# EAGLE board small-fix-cards-panelized (EAGLE 9.6.2)
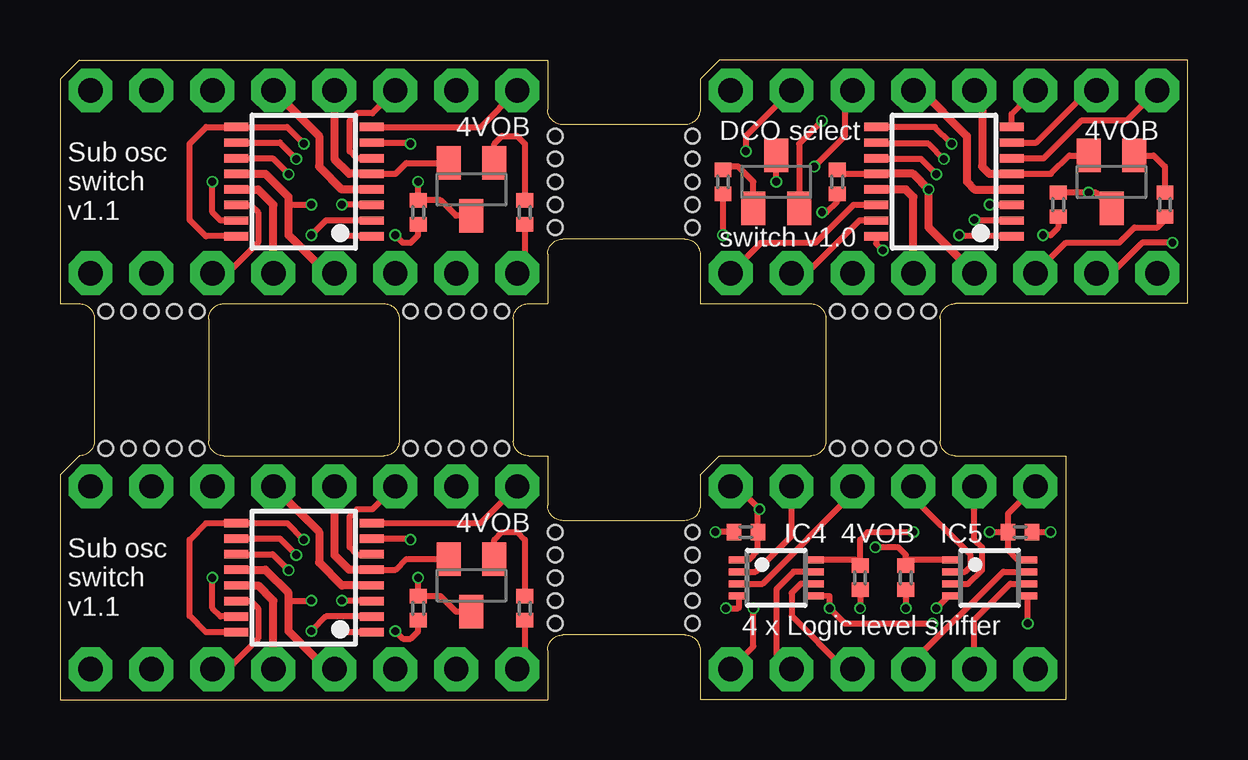
[diagram p0: board, top side]
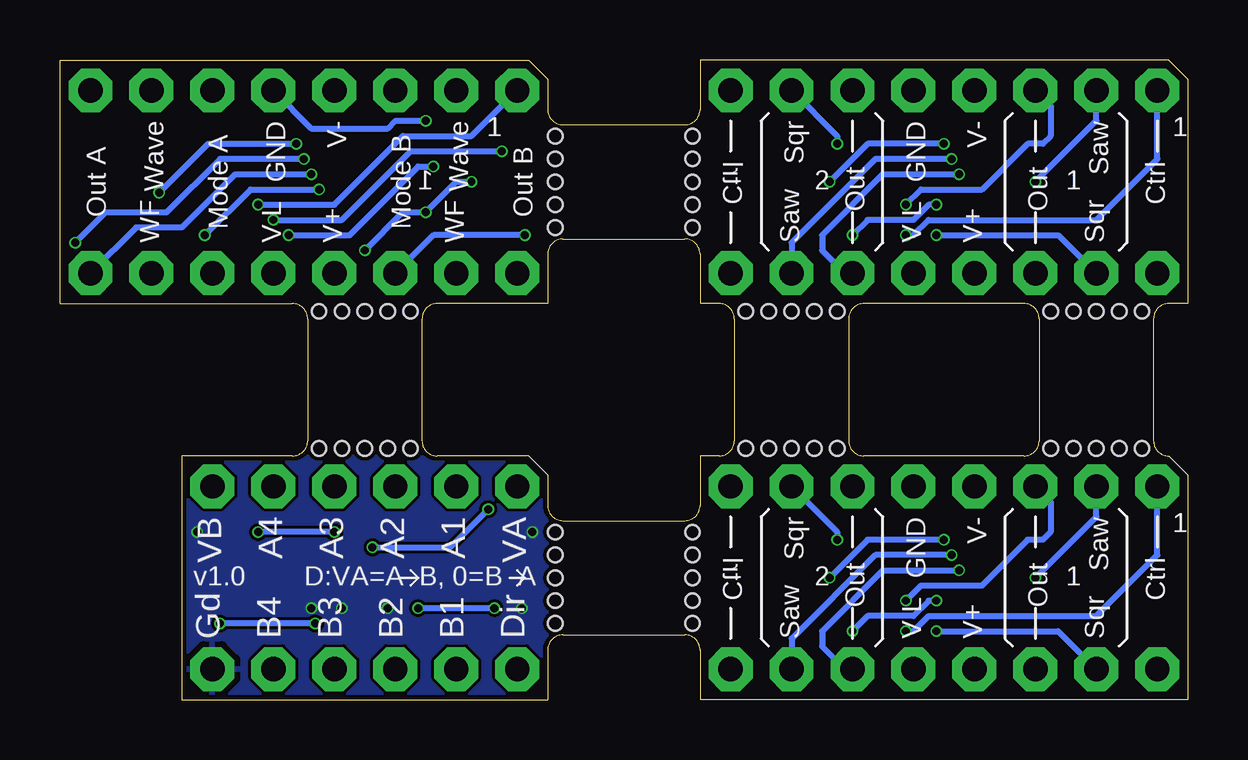
[diagram p1: board, bottom side, seen from below]

Size 46.99 x 26.67 mm. Coordinates in mm from the lower left corner, seen from the top.
Outline: 0,0 20.32,0 20.32,2.06 arc-90 20.95,2.7 26.04,2.7 arc-90 26.67,2.06 26.67,0 41.91,0 41.91,10.16 37.31,10.16 arc-90 36.67,10.79 36.67,15.88 arc-90 37.31,16.51 46.99,16.51 46.99,26.67 27.46,26.67 26.67,25.88 26.67,24.61 arc-90 26.04,23.97 20.95,23.97 arc-90 20.32,24.61 20.32,26.67 0.79,26.67 0,25.88 0,16.51 0.79,16.51 arc-90 1.43,15.88 1.43,10.79 arc-90 0.79,10.16 0,9.37 0,0
Outline: 6.83,10.16 arc-90 6.19,10.79 6.19,15.88 arc-90 6.83,16.51 13.49,16.51 arc-90 14.13,15.88 14.13,10.79 arc-90 13.49,10.16 6.83,10.16
Outline: 19.53,10.16 arc-90 18.89,10.79 18.89,15.88 arc-90 19.53,16.51 20.32,16.51 20.32,18.57 arc-90 20.95,19.21 26.04,19.21 arc-90 26.67,18.57 26.67,16.51 31.27,16.51 arc-90 31.91,15.88 31.91,10.79 arc-90 31.27,10.16 27.46,10.16 26.67,9.37 26.67,8.1 arc-90 26.04,7.46 20.95,7.46 arc-90 20.32,8.1 20.32,10.16 19.53,10.16
Copper layers (1*16): Top 0.035mm / dielectric 1.6mm / Bottom 0.035mm
Design rules "jlcpcb-2layers": minimum track width 5mil, minimum drill 0.3mm, track to track 5mil, track to pad 5mil, pad to pad 5mil, via to via 5mil, smd to smd 5mil, copper to edge 0.2mm, drill to drill 6mil, minimum pad ring 10mil, minimum via ring 3mil, stop-mask expansion 4mil, vias tented up to drill 0mil, thermal gap 10mil
Holes 0.6 mm at 5.71,10.48 4.76,10.48 3.81,10.48 2.86,10.48 1.91,10.48 1.91,16.19 2.86,16.19 3.81,16.19 4.76,16.19 5.71,16.19 18.41,10.48 17.46,10.48 16.51,10.48 15.56,10.48 14.61,10.48 14.61,16.19 15.56,16.19 16.51,16.19 17.46,16.19 18.41,16.19 20.64,3.17 20.64,4.13 20.64,5.08 20.64,6.03 20.64,6.99 26.35,6.99 26.35,6.03 26.35,5.08 26.35,4.13 26.35,3.17 36.2,10.48 35.24,10.48 34.29,10.48 33.34,10.48 32.38,10.48 32.38,16.19 33.34,16.19 34.29,16.19 35.24,16.19 36.2,16.19 20.64,19.68 20.64,20.64 20.64,21.59 20.64,22.54 20.64,23.5 26.35,23.5 26.35,22.54 26.35,21.59 26.35,20.64 26.35,19.68

## Footprints (pad centres in the part's own frame; a part is rotated, then mirrored left to right if it is on the bottom)
C0402-J = smd 0.6 x 0.7: 1 -0.5,0; 2 0.5,0
TSSOP16J = smd 0.35 x 1: 1 -2.268,-2.825; 2 -1.617,-2.825; 3 -0.968,-2.825; 4 -0.318,-2.825; 5 0.333,-2.825; 6 0.983,-2.825; 7 1.633,-2.825; 8 2.283,-2.825; 9 2.283,2.825; 10 1.633,2.825; 11 0.983,2.825; 12 0.333,2.825; 13 -0.318,2.825; 14 -0.968,2.825; 15 -1.617,2.825; 16 -2.268,2.825
VSSOP8J = smd 0.3 x 0.85: 1 -0.75,-1.55; 2 -0.25,-1.55; 3 0.25,-1.55; 4 0.75,-1.55; 5 0.75,1.55; 6 0.25,1.55; 7 -0.25,1.55; 8 -0.75,1.55
R0402 = smd 0.6 x 0.7: 1 -0.5,0; 2 0.5,0
SOT23-BEC = smd 1 x 1.4: B -0.95,-1.1; C 0,1.1; E 0.95,-1.1
MA08N-1J = drill 1.016 octagon: 1 -8.89,0; 2 -6.35,0; 3 -3.81,0; 4 -1.27,0; 5 1.27,0; 6 3.81,0; 7 6.35,0; 8 8.89,0
MA06N-1J = drill 1.016 octagon: 1 -6.35,0; 2 -3.81,0; 3 -1.27,0; 4 1.27,0; 5 3.81,0; 6 6.35,0

## Placement (x,y rotation side)
C1  1uF  [C0402-J]  28.57,6.99 180 top
C2  1uF  [C0402-J]  33.34,5.08 270 top
C3  1uF  [C0402-J]  35.24,5.08 270 top
C4  1uF  [C0402-J]  40.01,6.99 0 top
IC1  DG412-JT  [TSSOP16J]  10.16,5.08 90 top
IC2  DG412-JT  [TSSOP16J]  10.16,21.59 90 top
IC3  DG412-JT  [TSSOP16J]  36.83,21.59 90 top
IC4  SN74LVC2T45  [VSSOP8J]  29.84,5.08 270 top
IC5  SN74LVC2T45  [VSSOP8J]  38.73,5.08 270 top
R1  10k  [R0402]  19.37,3.81 90 top
R2  10k  [R0402]  19.37,20.32 90 top
R3  470R  [R0402]  14.92,3.81 270 top
R4  470R  [R0402]  14.92,20.32 270 top
R5  10k  [R0402]  27.62,21.59 90 top
R6  10k  [R0402]  46.04,20.64 90 top
R7  470R  [R0402]  32.38,21.59 90 top
R8  470R  [R0402]  41.59,20.64 270 top
T1  2n3904  [SOT23-BEC]  17.14,4.76 180 top
T2  2n3904  [SOT23-BEC]  17.14,21.27 180 top
T3  2n3904  [SOT23-BEC]  29.84,21.59 0 top
T4  2n3904  [SOT23-BEC]  43.81,21.59 180 top
X1  ROUND-IC-PIN  [MA08N-1J]  10.16,25.4 0 top
X2  ROUND-IC-PIN  [MA08N-1J]  10.16,17.78 180 top
X3  ROUND-IC-PIN  [MA08N-1J]  10.16,8.89 0 top
X4  ROUND-IC-PIN  [MA08N-1J]  10.16,1.27 180 top
X5  ROUND-IC-PIN  [MA08N-1J]  36.83,25.4 0 top
X6  ROUND-IC-PIN  [MA08N-1J]  36.83,17.78 180 top
X7  MA06-1JN  [MA06N-1J]  34.29,8.89 0 top
X8  MA06-1JN  [MA06N-1J]  34.29,1.27 180 top

## Library data of the parts
C1-C4 IC1-IC5 X1-X8 = joakim
R1-R8 = rcl; SPICEPREFIX: R
T1-T4 = transistor

## Nets
1_A_SUB_WAVE: IC2.1 X1.1
1_A_SUB_WAVE1: IC1.1 X3.1
1_OSC_B_OUT: IC3.3 X5.1
2_SSA1A: IC2.15 X1.2
2_SSA1A1: IC1.15 X3.2
2_WAVE_B_OUT: IC3.2 X5.2
3_A_SUB_1: IC2.3 X1.3
3_A_SUB_2: IC1.3 X3.3
3_B_MODE: IC3.1 X5.3
6_A_MODE: IC3.8 X5.6
6_A_SUB_1: IC1.6 X3.6
6_A_SUB_2: IC2.6 X1.6
7_SSQ2A: IC2.7 X1.7
7_SSQ2A1: IC1.7 X3.7
7_WAVE_A_OUT: IC3.7 X5.7
8_A_SUB_WAVE: IC2.8 X1.8
8_A_SUB_WAVE1: IC1.8 X3.8
8_OSC_A_OUT: IC3.6 X5.8
9_A_SUB_WAVE: R2.1 X2.1
9_A_SUB_WAVE1: R1.1 X4.1
9_OSC_A_OUT: IC3.11 X6.1
10_SSA2A: IC2.10 X2.2
10_SSA2A1: IC1.10 X4.2
10_WF_A_OUT: IC3.10 X6.2
11_A_MODE: R6.1 X6.3
11_A_SUB_1: IC1.11 X4.3
11_A_SUB_2: IC2.11 X2.3
11_NOT_A_MODE: IC3.9 R8.1 T4.C
14_A_SUB_1: IC2.14 X2.6
14_A_SUB_2: IC1.14 X4.6
14_B_MODE: R5.1 X6.6
14_NOT_B_MODE: IC3.16 R7.1 T3.C
15_SSQ1A: IC2.2 X2.7
15_SSQ1A1: IC1.2 X4.7
15_WF_B_OUT: IC3.15 X6.7
16_A_SUB_WAVE: X2.8
16_A_SUB_WAVE1: X4.8
16_OSC_B_OUT: IC3.14 X6.8
+3V3: C1.1 C3.1 IC4.1 IC5.1 X7.1
+5V: C2.1 C4.1 IC4.8 IC5.8 X7.6
A3: IC4.2 X7.2
A4: IC4.3 X7.3
A5: IC5.2 X7.4
A6: IC5.3 X7.5
B1: IC4.7 X8.5
B2: IC4.6 X8.4
B3: IC5.7 X8.3
B4: IC5.6 X8.2
DIR: IC4.5 IC5.5 X8.6
GND: IC2.5 T2.E X1.5
GND1: IC1.5 T1.E X3.5
GND2: IC3.5 T3.E T4.E X5.5
GND3: C1.2 C2.2 C3.2 C4.2 IC4.4 IC5.4 X8.1
N$1: R1.2 T1.B
N$2: R2.2 T2.B
N$3: R5.2 T3.B
N$4: R6.2 T4.B
NOT_A_SUB_WAVE: IC2.9 IC2.16 R4.1 T2.C
NOT_A_SUB_WAVE1: IC1.9 IC1.16 R3.1 T1.C
V+: IC2.13 X2.5
V+1: IC1.13 X4.5
V+2: IC3.13 X6.5
V-: IC2.4 X1.4
V-1: IC1.4 X3.4
V-2: IC3.4 X5.4
V_L: IC2.12 R4.2 X2.4
V_L1: IC1.12 R3.2 X4.4
V_L2: IC3.12 R7.2 R8.2 X6.4

## Tracks (layer width: path | path; a pad name or v marks a point on that pad's centre or on a via)
1_A_SUB_WAVE  (via drill 0.33)
  Top 0.254: v11.75,19.37 11.79,19.32 IC2.1
  Bottom 0.254: v11.75,19.37 11.43,19.37 10.79,20 3.81,20 1.27,22.54 X1.1
1_A_SUB_WAVE1  (via drill 0.33)
  Top 0.254: v11.75,2.86 11.79,2.81 IC1.1
  Bottom 0.254: v11.75,2.86 11.43,2.86 10.79,3.49 3.81,3.49 1.27,6.03 X3.1
1_OSC_B_OUT  (via drill 0.33)
  Top 0.254: 39.64,20.64 IC3.3 38.75,20.62 v38.73,20.64
  Bottom 0.254: v38.73,20.64 35.56,20.64 32.7,23.5 29.84,23.5 X5.1
2_SSA1A  (via drill 0.33)
  Top 0.254: v6.35,21.59 6.35,20.32 6.7,19.97 IC2.15
  Bottom 0.254: v6.35,21.59 3.81,24.13 X1.2
2_SSA1A1  (via drill 0.33)
  Top 0.254: v6.35,5.08 6.35,3.81 6.7,3.46 IC1.15
  Bottom 0.254: v6.35,5.08 3.81,7.62 X3.2
2_WAVE_B_OUT  (via drill 0.33)
  Top 0.254: IC3.2 38.13,19.97 v38.1,20 | X5.2 28.57,23.5 v28.57,22.86
  Bottom 0.254: v38.1,20 35.24,20 32.38,22.86 v28.57,22.86
3_A_SUB_1  (via drill 0.33)
  Top 0.254: 12.97,20.64 12.38,20.64 | 12.38,20.64 v11.75,20.64 | IC2.3 12.4,20.62 12.38,20.64
  Bottom 0.254: v11.75,20.64 11.11,21.27 8.57,21.27 6.67,23.18 6.03,23.18 5.71,23.5 5.71,24.77 X1.3
3_A_SUB_2  (via drill 0.33)
  Top 0.254: 12.97,4.13 12.38,4.13 | 12.38,4.13 v11.75,4.13 | IC1.3 12.4,4.11 12.38,4.13
  Bottom 0.254: v11.75,4.13 11.11,4.76 8.57,4.76 6.67,6.67 6.03,6.67 5.71,6.99 5.71,8.26 X3.3
3_B_MODE  (via drill 0.33)
  Top 0.254: IC3.1 37.51,19.32 v37.47,19.37 | X5.3 32.7,25.08 32.7,23.5 v31.43,22.23
  Bottom 0.254: v37.47,19.37 34.92,19.37 32.07,22.23 v31.43,22.23
6_A_MODE
  Top 0.254: X5.6 39.66,24.41 IC3.8
6_A_SUB_1
  Top 0.254: X3.6 13.02,7.94 12.38,7.94 12.06,7.62 12.06,6.35 12.35,6.06 IC1.6
6_A_SUB_2
  Top 0.254: X1.6 13.02,24.45 12.38,24.45 12.06,24.13 12.06,22.86 12.35,22.57 IC2.6
7_SSQ2A  (via drill 0.33)
  Top 0.254: v14.61,23.18 14.56,23.22 IC2.7
  Bottom 0.254: X1.7 14.61,23.5 v14.61,23.18
7_SSQ2A1  (via drill 0.33)
  Top 0.254: v14.61,6.67 14.56,6.71 IC1.7
  Bottom 0.254: X3.7 14.61,6.99 v14.61,6.67
7_WAVE_A_OUT
  Top 0.254: IC3.7 40.69,23.22 42.86,25.4 X5.7
8_A_SUB_WAVE
  Top 0.254: X1.8 17.52,23.87 IC2.8
8_A_SUB_WAVE1
  Top 0.254: X3.8 17.52,7.36 IC1.8
8_OSC_A_OUT
  Top 0.254: IC3.6 40.99,22.57 42.55,24.13 44.45,24.13 X5.8
9_A_SUB_WAVE
  Top 0.254: R2.1 19.37,18.1 X2.1
9_A_SUB_WAVE1
  Top 0.254: R1.1 19.37,1.59 X4.1
9_OSC_A_OUT  (via drill 0.33)
  Top 0.254: IC3.11 34.03,22.54 35.88,22.54 v36.51,21.91
  Bottom 0.254: v36.51,21.91 39.69,21.91 41.91,19.68 43.81,19.68 X6.1
10_SSA2A  (via drill 0.33)
  Top 0.254: v9.84,22.54 9.16,23.22 IC2.10
  Bottom 0.254: v9.84,22.54 13.02,22.54 16.51,19.05 X2.2
10_SSA2A1  (via drill 0.33)
  Top 0.254: v9.84,6.03 9.16,6.71 IC1.10
  Bottom 0.254: v9.84,6.03 13.02,6.03 16.51,2.54 X4.2
10_WF_A_OUT  (via drill 0.33)
  Top 0.254: IC3.10 34.05,23.18 36.2,23.18 v36.83,22.54 | X6.2 43.81,17.78 45.09,19.05 v46.35,19.05
  Bottom 0.254: v36.83,22.54 40.32,22.54 42.55,20.32 45.09,20.32 v46.35,19.05
11_A_MODE
  Top 0.254: X6.3 41.91,19.05 44.13,19.05 44.77,19.68 45.72,19.68 46.04,20 R6.1
11_A_SUB_1  (via drill 0.33)
  Top 0.254: v9.53,5.4 8.86,6.06 IC1.11
  Bottom 0.254: v9.53,5.4 12.7,5.4 15.24,2.86 15.24,2.22 14.29,1.27 X4.3
11_A_SUB_2  (via drill 0.33)
  Top 0.254: v9.53,21.91 8.86,22.57 IC2.11
  Bottom 0.254: v9.53,21.91 12.7,21.91 15.24,19.37 15.24,18.73 14.29,17.78 X2.3
11_NOT_A_MODE  (via drill 0.33)
  Top 0.254: T4.C 43.17,21.14 v42.86,21.14 R8.1 | v37.15,23.18 36.45,23.87 IC3.9
  Bottom 0.254: v42.86,21.14 40.82,23.18 v37.15,23.18
14_A_SUB_1
  Top 0.254: X2.6 6.99,17.78 8.26,19.05 8.26,20.32 7.95,20.62 IC2.14
14_A_SUB_2
  Top 0.254: X4.6 6.99,1.27 8.26,2.54 8.26,3.81 7.95,4.11 IC1.14
14_B_MODE  (via drill 0.33)
  Top 0.254: R5.1 v27.62,19.37
  Bottom 0.254: v27.62,19.37 31.43,19.37 X6.6
14_NOT_B_MODE  (via drill 0.33)
  Top 0.254: IC3.16 34.01,19.02 v34.29,18.73 | v29.84,21.59 T3.C | R7.1 32.38,20.77 31.93,20.32 v31.75,20.32
  Bottom 0.254: v29.84,21.59 30.48,21.59 v31.75,20.32 32.7,20.32 v34.29,18.73
15_SSQ1A  (via drill 0.33)
  Top 0.254: v10.48,19.37 11.08,19.97 IC2.2
  Bottom 0.254: v10.48,19.37 5.4,19.37 X2.7
15_SSQ1A1  (via drill 0.33)
  Top 0.254: v10.48,2.86 11.08,3.46 IC1.2
  Bottom 0.254: v10.48,2.86 5.4,2.86 X4.7
15_WF_B_OUT
  Top 0.254: IC3.15 33.31,19.97 31.11,17.78 X6.7
16_OSC_B_OUT
  Top 0.254: 34.02,20.64 IC3.14 33.05,20.62 31.46,19.04 29.2,19.04 X6.8
+3V3  (via drill 0.33)
  Top 0.254: IC4.1 28.69,5.83 29.07,6.21 C1.1 | C1.1 29.15,7.06 | v33.97,6.35 34.92,6.35 35.24,6.03 35.24,5.71 | X7.1 28.19,8.89 v29.15,7.94 29.07,7.87 C1.1 | C3.1 35.24,5.71 | IC5.1 35.36,5.83 35.24,5.71
  Bottom 0.254: v29.15,7.94 30.73,6.35 v33.97,6.35
+5V  (via drill 0.33)
  Top 0.254: IC4.8 33.13,5.83 33.13,5.78 C2.1 33.34,6.67 33.66,6.99 v35.56,6.99 | v38.73,6.99 C4.1 | IC5.8 39.89,5.83 39.51,6.21 C4.1 | C4.1 39.51,7.75 X7.6
  Bottom 0.254: v35.56,6.99 v38.73,6.99
A3
  Top 0.254: IC4.2 28.98,5.33 30.48,6.83 X7.2
A4
  Top 0.254: IC4.3 29.28,4.83 33.02,8.57 X7.3
A5
  Top 0.254: IC5.2 37.72,5.33 37.94,5.56 37.94,6.03 35.56,8.41 X7.4
A6
  Top 0.254: IC5.3 37.85,4.83 38.42,5.4 38.42,6.35 38.1,6.67 X7.5
B1
  Top 0.254: IC4.7 30.57,5.33 29.84,4.6 29.84,1.91 X8.5
B2
  Top 0.254: IC4.6 30.86,4.83 30.48,4.45 30.48,3.49 32.7,1.27 X8.4
B3
  Top 0.254: X8.3 35.56,1.59 39.3,5.33 IC5.7
B4
  Top 0.254: X8.2 38.1,3.33 39.6,4.83 IC5.6
DIR  (via drill 0.33)
  Top 0.254: X8.6 28.89,2.22 v28.89,3.81 | IC4.5 32.07,4.31 v32.07,3.81 32.7,3.17 v36.35,3.17 | v40.32,3.17 40.32,4.24 40.3,4.26 40.32,4.29 IC5.5
  Bottom 0.254: v28.89,3.81 v32.07,3.81 | v36.35,3.17 v40.32,3.17
GND
  Top 0.254: IC2.5 13.98,21.92 14.44,22.37 T2.E
  Top 0.33: X1.5 11.43,22.54 12.05,21.92 IC2.5
GND1
  Top 0.254: IC1.5 13.98,5.41 14.44,5.86 T1.E
  Top 0.33: X3.5 11.43,6.03 12.05,5.41 IC1.5
GND2  (via drill 0.33)
  Top 0.254: IC3.5 41.29,21.92 42.06,22.69 T4.E | v31.75,24.13 30.8,23.18 T3.E
  Top 0.33: X5.5 38.42,25.08 38.42,22.23 38.72,21.92 IC3.5
  Bottom 0.254: X5.5 36.51,23.81 33.34,23.81 33.02,24.13 v31.75,24.13
GND3  (via drill 0.33)
  Top 0.254: C1.2 v27.3,6.99 | IC5.4 37.03,4.33 v36.51,3.81 | C2.2 v33.34,3.81 | C3.2 v35.24,3.81 | C4.2 v41.27,6.99 | IC4.4 28.3,3.85 28.26,3.81 v27.75,3.81
  pour Bottom: 26.35,10.48 42.23,10.48 42.23,-0.32 26.35,-0.32
N$1
  Top 0.254: T1.B 18.09,6.67 18.41,6.99 19.05,6.99 19.37,6.67 R1.2
N$2
  Top 0.254: T2.B 18.09,23.18 18.41,23.5 19.05,23.5 19.37,23.18 R2.2
N$3
  Top 0.254: T3.B 28.89,21.59 28.26,22.23 27.94,22.23 27.8,22.09 R5.2
N$4
  Top 0.254: T4.B 45.57,22.69 46.04,22.23 R6.2
NOT_A_SUB_WAVE  (via drill 0.33)
  Top 0.254: T2.C 16.51,20.17 15.86,20.82 R4.1 v14.92,21.59 | v10.16,23.18 9.46,23.87 IC2.9 6.09,23.87 5.4,23.18 5.4,20 6.08,19.32 IC2.16
  Bottom 0.254: v14.92,21.59 13.34,23.18 v10.16,23.18
NOT_A_SUB_WAVE1  (via drill 0.33)
  Top 0.254: T1.C 16.51,3.66 15.86,4.31 R3.1 v14.92,5.08 | v10.16,6.67 9.46,7.36 IC1.9 6.09,7.36 5.4,6.67 5.4,3.49 6.08,2.81 IC1.16
  Bottom 0.254: v14.92,5.08 13.34,6.67 v10.16,6.67
V+
  Top 0.33: X2.5 8.89,20.64 8.26,21.27 IC2.13
V+1
  Top 0.33: X4.5 8.89,4.13 8.26,4.76 IC1.13
V+2
  Top 0.33: IC3.13 35.24,21.27 35.56,20.95 X6.5
V-
  Top 0.33: X1.4 10.79,23.5 10.79,22.23 11.75,21.27 IC2.4
V-1
  Top 0.33: X3.4 10.79,6.99 10.79,5.71 11.75,4.76 IC1.4
V-2
  Top 0.33: X5.4 35.88,25.4 37.78,23.5 37.78,21.59 38.1,21.27 IC3.4
V_L  (via drill 0.33)
  Top 0.254: 9.53,20.64 v10.48,20.64 | v13.97,19.37 14.29,19.05 14.61,19.05 14.92,19.37 R4.2
  Top 0.33: X2.4 11.11,17.78 9.53,19.37 9.53,20.64 9.53,20.95 8.56,21.92 IC2.12
  Bottom 0.254: v10.48,20.64 10.79,20.64 11.43,20 13.34,20 v13.97,19.37
V_L1  (via drill 0.33)
  Top 0.254: 9.53,4.13 v10.48,4.13 | v13.97,2.86 14.29,2.54 14.61,2.54 14.92,2.86 R3.2
  Top 0.33: X4.4 11.11,1.27 9.53,2.86 9.53,4.13 9.53,4.45 8.56,5.41 IC1.12
  Bottom 0.254: v10.48,4.13 10.79,4.13 11.43,3.49 13.34,3.49 v13.97,2.86
V_L2  (via drill 0.33)
  Top 0.254: R8.2 41.59,19.68 41.27,19.37 v40.96,19.37 | R7.2 32.45,21.92 IC3.12
  Top 0.33: X6.4 36.2,19.68 v36.2,21.27 35.55,21.92 IC3.12
  Bottom 0.254: v40.96,19.37 39.05,21.27 v36.2,21.27

## Text on the board
tNames: 4VOB | DCO select | 4VOB | Sub osc / switch / v1.1 | switch v1.0 | 4VOB | 4VOB | Sub osc / switch / v1.1 | 4 x Logic level shifter
bNames: Saw | V- | GND | Sqr | Wave | V- | GND | Wave | 1 | 1 | Out | Out | Out B | Mode B | Mode A | Out A | Ctrl | 1 | 2 | Ctrl | 1 | Sqr | V+ | V L | Saw | WF | V+ | V L | WF | Saw | V- | GND | Sqr | VA | A1 | A2 | A3 | A4 | VB | 1 | Out | Out | 1 | 2 | D:VA=A B, 0=B A | v1.0 | Ctrl | Ctrl | Sqr | V+ | V L | Saw | Dir | B1 | B2 | B3 | B4 | Gd